# EAGLE board sch (EAGLE 9.3.2)

Size 100 x 80 mm. Coordinates in mm from the lower left corner, seen from the top.
Outline: 0,0 100,0 100,80 0,80 0,0
Copper layers (1*16): Top 0.035mm / dielectric 1.5mm / Bottom 0.035mm
Design rules "default": minimum track width 6mil, minimum drill 0.35mm, track to track 6mil, track to pad 6mil, pad to pad 6mil, via to via 6mil, smd to smd 6mil, copper to edge 40mil, drill to drill 6mil, minimum pad ring 10mil, minimum via ring 8mil, stop-mask expansion 4mil, vias tented up to drill 0mil, thermal gap 10mil

## Footprints (pad centres in the part's own frame; a part is rotated, then mirrored left to right if it is on the bottom)
308-100 = drill 0.26 pad 0.8 long: NEG -5.5,-2.119; POS -5.5,2.119
MA04-1 = drill 1.016 long: 1 -3.81,0; 2 -1.27,0; 3 1.27,0; 4 3.81,0
RFID-RC522 = drill 1.016 long: 3V3 -8.89,0; GND -3.81,0; IRQ -1.27,0; MISO 1.27,0; MOSI 3.81,0; RST -6.35,0; SCK 6.35,0; SS 8.89,0
TSOP17XX = drill 0.813 long: GND -3.81,0; OUT 3.81,0; V+ -1.27,0
MEGAOUTLINE = drill 0.8: 0 12.7,24.13; 1 10.16,24.13; 2 7.62,24.13; 3 5.08,24.13; 3V3 -15.24,-24.13; 4 2.54,24.13; 5 0,24.13; 5V -12.7,-24.13; 6 -2.54,24.13; 7 -5.08,24.13; 8 -8.89,24.13; 9 -11.43,24.13; 10 -13.97,24.13; 11 -16.51,24.13; 12 -19.05,24.13; 13 -21.59,24.13; 14 17.78,24.13; 15 20.32,24.13; 16 22.86,24.13; 17 25.4,24.13; 18 27.94,24.13; 19 30.48,24.13; 20 33.02,24.13; 21 35.56,24.13; 22 43.18,21.59; 23 45.72,21.59; 24 43.18,19.05; 25 45.72,19.05; 26 43.18,16.51; 27 45.72,16.51; 28 43.18,13.97; 29 45.72,13.97; 30 43.18,11.43; 31 45.72,11.43; 32 43.18,8.89; 33 45.72,8.89; 34 43.18,6.35; 35 45.72,6.35; 36 43.18,3.81; 37 45.72,3.81; 38 43.18,1.27; 39 45.72,1.27; 40 43.18,-1.27; 41 45.72,-1.27; 42 43.18,-3.81; 43 45.72,-3.81; 44 43.18,-6.35; 45 45.72,-6.35; 46 43.18,-8.89; 47 45.72,-8.89; 48 43.18,-11.43; 49 45.72,-11.43; 50 43.18,-13.97; 51 45.72,-13.97; 52 43.18,-16.51; 53 45.72,-16.51; A0 0,-24.13; A1 2.54,-24.13; A2 5.08,-24.13; A3 7.62,-24.13; A4 10.16,-24.13; A5 12.7,-24.13; A6 15.24,-24.13; A7 17.78,-24.13; A8 22.86,-24.13; A9 25.4,-24.13; A10 27.94,-24.13; A11 30.48,-24.13; A12 33.02,-24.13; A13 35.56,-24.13; A14 38.1,-24.13; A15 40.64,-24.13; AREF -26.67,24.13; GND@1 -24.13,24.13; GND@2 -10.16,-24.13; GND@3 -7.62,-24.13; GND@4 43.18,24.13; GND@5 45.72,24.13; GND@6 43.18,-19.05; GND@7 45.72,-19.05; RESET -17.78,-24.13; VIN -5.08,-24.13

## Placement (x,y rotation side)
DEST_M1  308-100  [308-100]  -17.78,121.92 0 top  (outside the outline)
DEST_M2  308-100  [308-100]  -29.21,121.92 0 top  (outside the outline)
HC-05  [MA04-1]  -107.95,-3.81 0 top  (outside the outline)
M1  [RFID-RC522]  -135.89,45.72 0 top  (outside the outline)
SC1_M  308-100  [308-100]  -40.64,121.92 0 top  (outside the outline)
SC1_SENS1  TSOP1730  [TSOP17XX]  -17.78,132.08 0 top  (outside the outline)
SC1_SENS2  TSOP1730  [TSOP17XX]  -27.94,132.08 0 top  (outside the outline)
SC2_M  308-100  [308-100]  -52.07,121.92 0 top  (outside the outline)
SC2_SENS  TSOP1730  [TSOP17XX]  -38.1,132.08 0 top  (outside the outline)
SC3_M  308-100  [308-100]  -63.5,121.92 0 top  (outside the outline)
SC3_SENS  TSOP1730  [TSOP17XX]  -48.26,132.08 0 top  (outside the outline)
SR_FB  308-100  [308-100]  -74.93,121.92 0 top  (outside the outline)
SR_RL  308-100  [308-100]  -86.36,121.92 0 top  (outside the outline)
SR_UD  308-100  [308-100]  -97.79,121.92 0 top  (outside the outline)
SRB_SENS  TSOP1730  [TSOP17XX]  -58.42,132.08 0 top  (outside the outline)
SRB_SENS1  TSOP1730  [TSOP17XX]  -110.49,-7.62 0 top  (outside the outline)
U$1  MEGA_DEVICE  [MEGAOUTLINE]  -64.77,90.17 0 top  (outside the outline)
U$2  MEGA_DEVICE  [MEGAOUTLINE]  -104.14,-39.37 0 top  (outside the outline)

## Library data of the parts
DEST_M1 DEST_M2 SC1_M SC2_M SC3_M SR_FB SR_RL SR_UD = motor; PRECISION_MICRODRIVES: 308-100
HC-05 = con-lstb; OC_FARNELL: unknown; OC_NEWARK: unknown
M1 = mfrc522-module
SC1_SENS1 SC1_SENS2 SC2_SENS SC3_SENS SRB_SENS SRB_SENS1 = tsop
U$1 U$2 = ArduinoMegaOutline

## Nets
N$1: U$1.48
N$2: U$1.40
N$3: U$1.38
N$4: U$1.47
N$5: U$1.45
N$6: U$1.43
N$7: U$1.41
N$8: U$1.39
N$9: U$1.31
N$10: U$1.37
N$11: U$1.35
N$12: U$1.33
N$13: U$1.29
N$14: U$1.27
N$15: U$1.GND@5
N$16: SC1_SENS1.OUT U$1.2
N$17: SC1_SENS2.OUT U$1.3
N$18: SC2_SENS.OUT U$1.4
N$19: SC3_SENS.OUT U$1.10
N$20: SRB_SENS.OUT U$1.49
N$21: HC-05.2 SC1_SENS1.V+ SC1_SENS2.V+ SC2_SENS.V+ SC3_SENS.V+ SRB_SENS1.V+ SRB_SENS.V+ U$1.5V
N$22: HC-05.1 SC1_SENS1.GND SC1_SENS2.GND SC2_SENS.GND SC3_SENS.GND SRB_SENS1.GND SRB_SENS.GND U$1.GND@4
N$23: SC1_M.POS U$1.7
N$24: SC1_M.NEG U$1.6
N$25: SC2_M.POS U$1.9
N$26: SC2_M.NEG U$1.8
N$27: SC3_M.POS U$1.12
N$28: SC3_M.NEG U$1.11
N$29: SR_UD.POS U$1.26
N$30: SR_UD.NEG U$1.24
N$31: U$1.32
N$32: SR_RL.NEG U$1.20 U$1.30
N$33: SR_FB.NEG U$1.34
N$34: SR_FB.POS U$1.36
N$35: DEST_M1.NEG U$1.22
N$36: DEST_M1.POS U$1.23
N$37: DEST_M2.NEG U$1.25
N$38: DEST_M2.POS U$1.42
N$39: SR_RL.POS
N$40: U$1.18 U$2.19
N$41: U$1.19 U$2.18
N$42: U$1.17 U$2.16
N$43: U$1.16 U$2.17
N$44: U$1.GND@2 U$2.GND@4
N$45: M1.3V3 U$2.RESET
N$46: HC-05.4 U$1.1
N$47: HC-05.3 U$1.0
N$50: SRB_SENS1.OUT U$1.28
N$52: M1.RST U$2.5
N$53: M1.GND U$2.GND@2
N$54: M1.MISO U$2.50
N$55: M1.MOSI U$2.51
N$56: M1.SCK U$2.52
N$57: M1.SS U$2.53

## Tracks (layer width: path | path; a pad name or v marks a point on that pad's centre or on a via)
N$16  (1 unrouted)
N$17  (1 unrouted)
N$18  (1 unrouted)
N$19  (1 unrouted)
N$20  (1 unrouted)
N$21  (7 unrouted)
N$22  (7 unrouted)
N$23  (1 unrouted)
N$24  (1 unrouted)
N$25  (1 unrouted)
N$26  (1 unrouted)
N$27  (1 unrouted)
N$28  (1 unrouted)
N$29  (1 unrouted)
N$30  (1 unrouted)
N$32  (2 unrouted)
N$33  (1 unrouted)
N$34  (1 unrouted)
N$35  (1 unrouted)
N$36  (1 unrouted)
N$37  (1 unrouted)
N$38  (1 unrouted)
N$40  (1 unrouted)
N$41  (1 unrouted)
N$42  (1 unrouted)
N$43  (1 unrouted)
N$44  (1 unrouted)
N$45  (1 unrouted)
N$46  (1 unrouted)
N$47  (1 unrouted)
N$50  (1 unrouted)
N$52  (1 unrouted)
N$53  (1 unrouted)
N$54  (1 unrouted)
N$55  (1 unrouted)
N$56  (1 unrouted)
N$57  (1 unrouted)